# EAGLE board BrewMonitor-v1.0 (EAGLE 7.0.0)
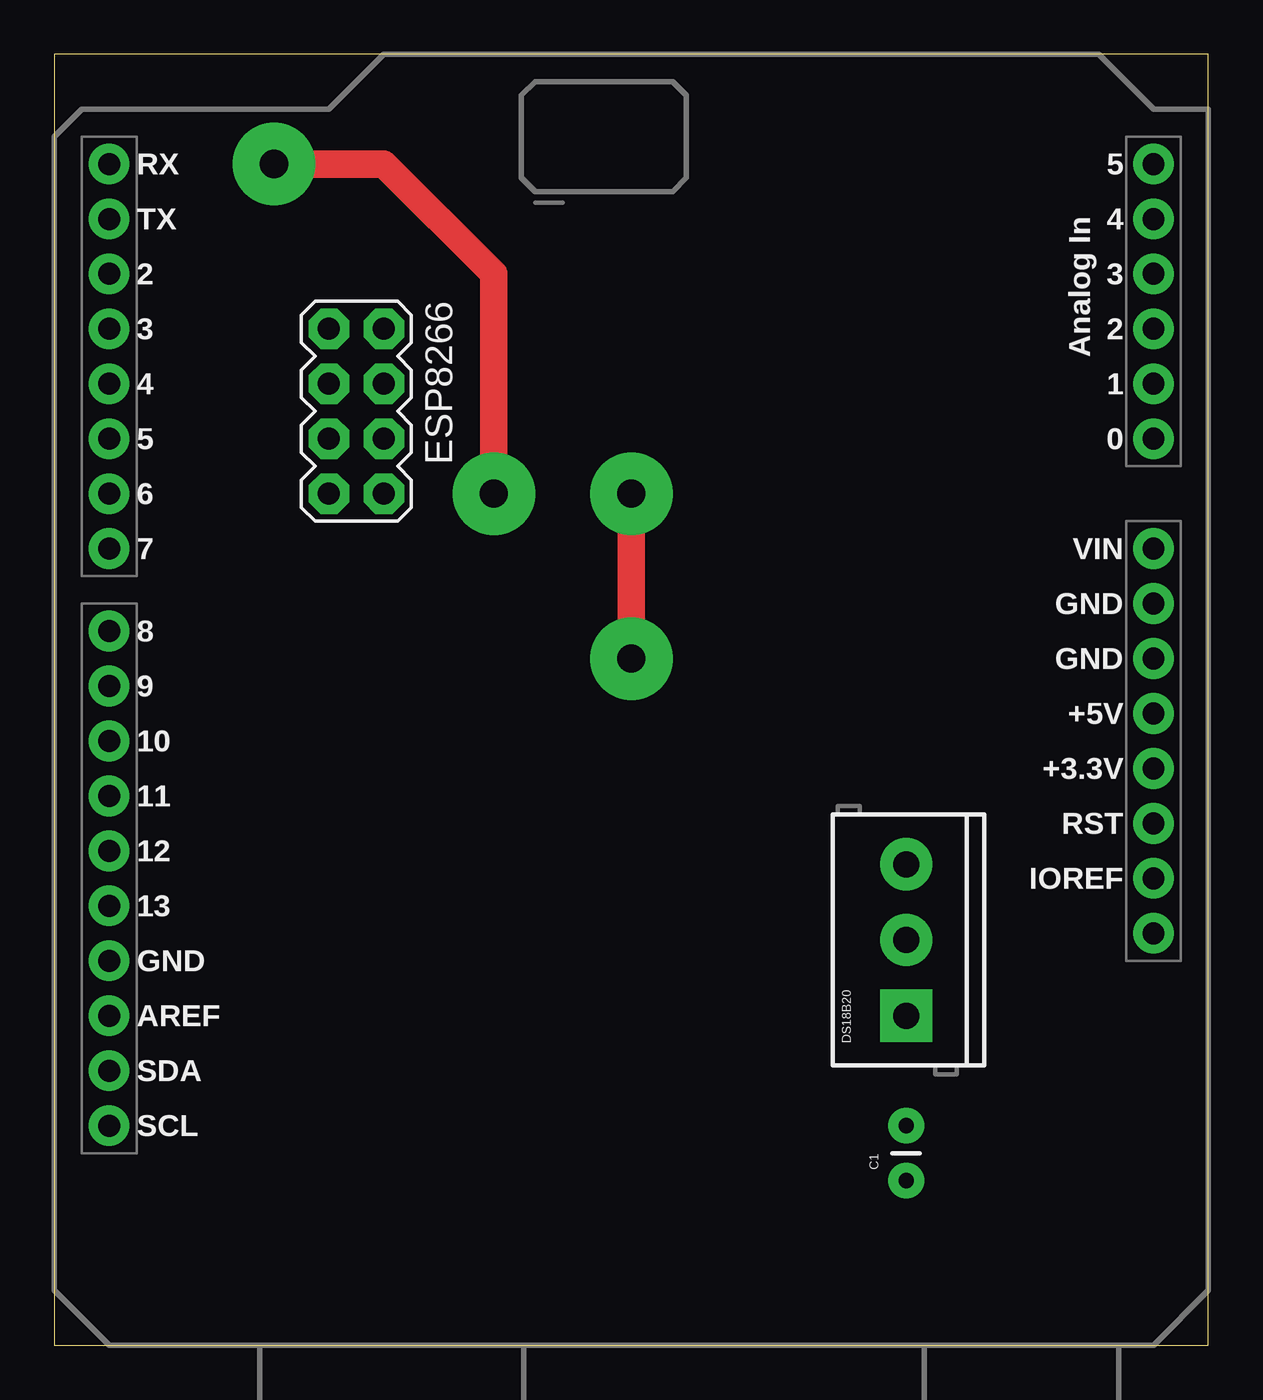
[diagram p0: board, top side]
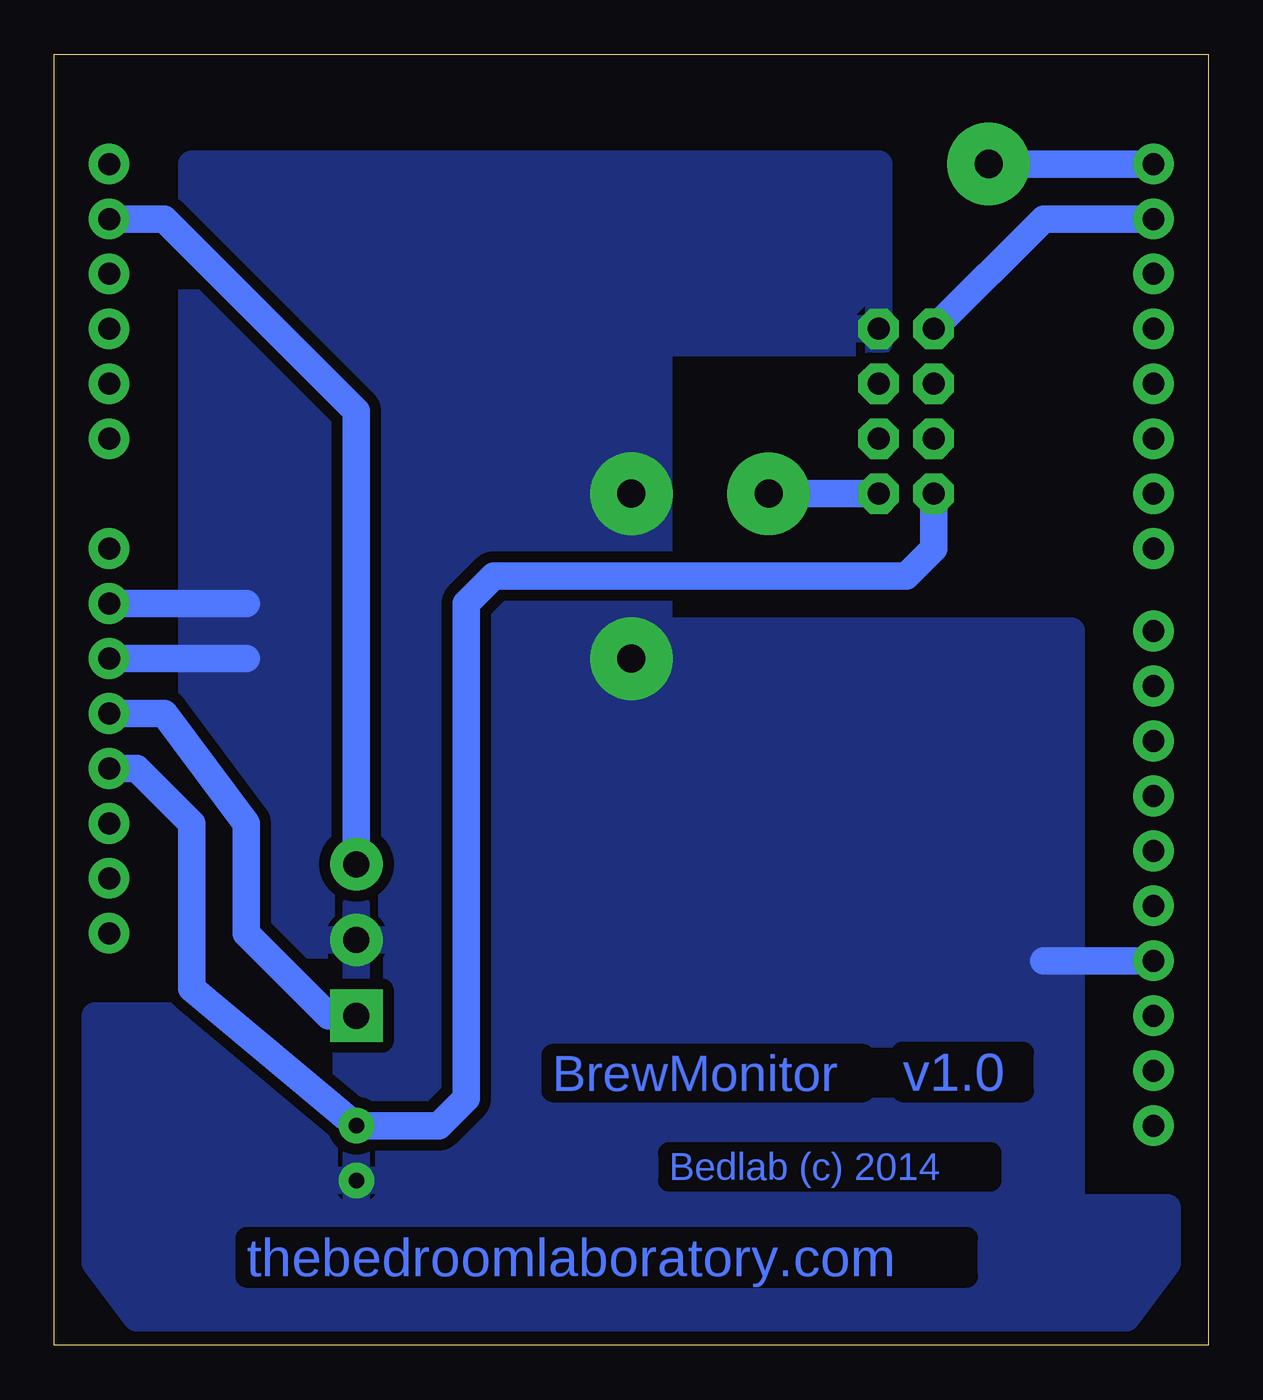
[diagram p1: board, bottom side, seen from below]

Size 53.34 x 59.69 mm. Coordinates in mm from the lower left corner, seen from the top.
Outline: 0,0 53.34,0 53.34,59.69 0,59.69 0,0
Copper layers (1*16): Top 0.035mm / dielectric 1.5mm / Bottom 0.035mm
Design rules "SparkFun-Home": minimum track width 24mil, minimum drill 20mil, track to track 20mil, track to pad 20mil, pad to pad 20mil, via to via 20mil, smd to smd 8mil, copper to edge 10mil, drill to drill 8mil, minimum pad ring 12mil, minimum via ring 10mil, stop-mask expansion 4mil, vias tented up to drill 25mil, thermal gap 10mil

## Footprints (pad centres in the part's own frame; a part is rotated, then mirrored left to right if it is on the bottom)
CAP-PTH-SMALL = drill 0.7 pad 1.651: 1 0,0; 2 2.54,0
SCREWTERMINAL-3.5MM-3 = drill 1.2 pad 2.413 square: 1 0,0 | drill 1.2 pad 2.413: 2 3.5,0; 3 7,0
2X4 = drill 1.016 pad 1.88 octagon: 1 -3.81,-1.27; 2 -3.81,1.27; 3 -1.27,-1.27; 4 -1.27,1.27; 5 1.27,-1.27; 6 1.27,1.27; 7 3.81,-1.27; 8 3.81,1.27
UNO_R3_SHIELD = drill 1.016 pad 1.88: 3.3V 50.8,26.67; 5V 50.8,29.21; A0 50.8,41.91; A1 50.8,44.45; A2 50.8,46.99; A3 50.8,49.53; A4 50.8,52.07; A5 50.8,54.61; AREF 2.54,15.24; D2 2.54,49.53; D3 2.54,46.99; D4 2.54,44.45; D5 2.54,41.91; D6 2.54,39.37; D7 2.54,36.83; D8 2.54,33.02; D9 2.54,30.48; D10 2.54,27.94; D11 2.54,25.4; D12 2.54,22.86; D13 2.54,20.32; GND@0 50.8,31.75; GND@1 50.8,34.29; GND@2 2.54,17.78; IOREF 50.8,21.59; NC 50.8,19.05; RES 50.8,24.13; RX 2.54,54.61; SCL 2.54,10.16; SDA 2.54,12.7; TX 2.54,52.07; VIN 50.8,36.83

## Placement (x,y rotation side)
C1  1uF  [CAP-PTH-SMALL]  39.37,7.62 90 top
DS18B20  M03X1  [SCREWTERMINAL-3.5MM-3]  39.37,15.24 90 top
ESP8266  M04X2  [2X4]  13.97,43.18 270 top
U$5  ARDUINO_R3_SHIELD  [UNO_R3_SHIELD]  0,0 0 top

## Library data of the parts
C1 = SparkFun-Passives
DS18B20 ESP8266 = SparkFun-Connectors
U$5 = SparkFun-Boards

## Nets
3.3V: C1.2 ESP8266.7 U$5.3.3V
5V: DS18B20.1 U$5.5V
A4: DS18B20.3 U$5.A4
GND: C1.1 DS18B20.2 ESP8266.2 U$5.GND@0 U$5.GND@1 U$5.GND@2
RX: ESP8266.8 U$5.RX
TX: ESP8266.1 U$5.TX

## Tracks (layer width: path | path; a pad name or v marks a point on that pad's centre or on a via)
3.3V
  Bottom 1.27: U$5.3.3V 49.53,26.67 46.99,24.13 46.99,16.51 C1.2 35.56,10.16 34.29,11.43 34.29,34.29 33.02,35.56 13.97,35.56 12.7,36.83 ESP8266.7
5V
  Bottom 1.27: DS18B20.1 40.64,15.24 44.45,19.05 44.45,24.13 48.26,29.21 U$5.5V
A4
  Bottom 1.27: DS18B20.3 39.37,43.18 48.26,52.07 U$5.A4
GND  (via drill 1.3 pad 3.81)
  Top 1.27: v26.67,39.37 v26.67,31.75
  Bottom 1.27: U$5.GND@2 7.62,17.78 | U$5.GND@0 44.45,31.75 | U$5.GND@1 44.45,34.29
  pour Bottom (isolate 0.406): 6.35,33.02 6.35,6.35 1.91,6.35 1.91,3.81 3.81,1.27 49.53,1.27 51.44,3.81 51.44,15.24 46.99,15.24 46.99,54.61 15.24,54.61 15.24,46.35 25.4,46.35 25.4,33.02
RX  (via drill 1.3 pad 3.81)
  Top 1.27: v10.16,54.61 15.24,54.61 20.32,49.53 v20.32,39.37
  Bottom 1.27: U$5.RX v10.16,54.61 | ESP8266.8 v20.32,39.37
TX
  Bottom 1.27: U$5.TX 7.62,52.07 ESP8266.1

## Text on the board
Bottom: v1.0 | BrewMonitor | Bedlab (c) 2014 | thebedroomlaboratory.com